# Allegro board quadcopter_0_1.brd
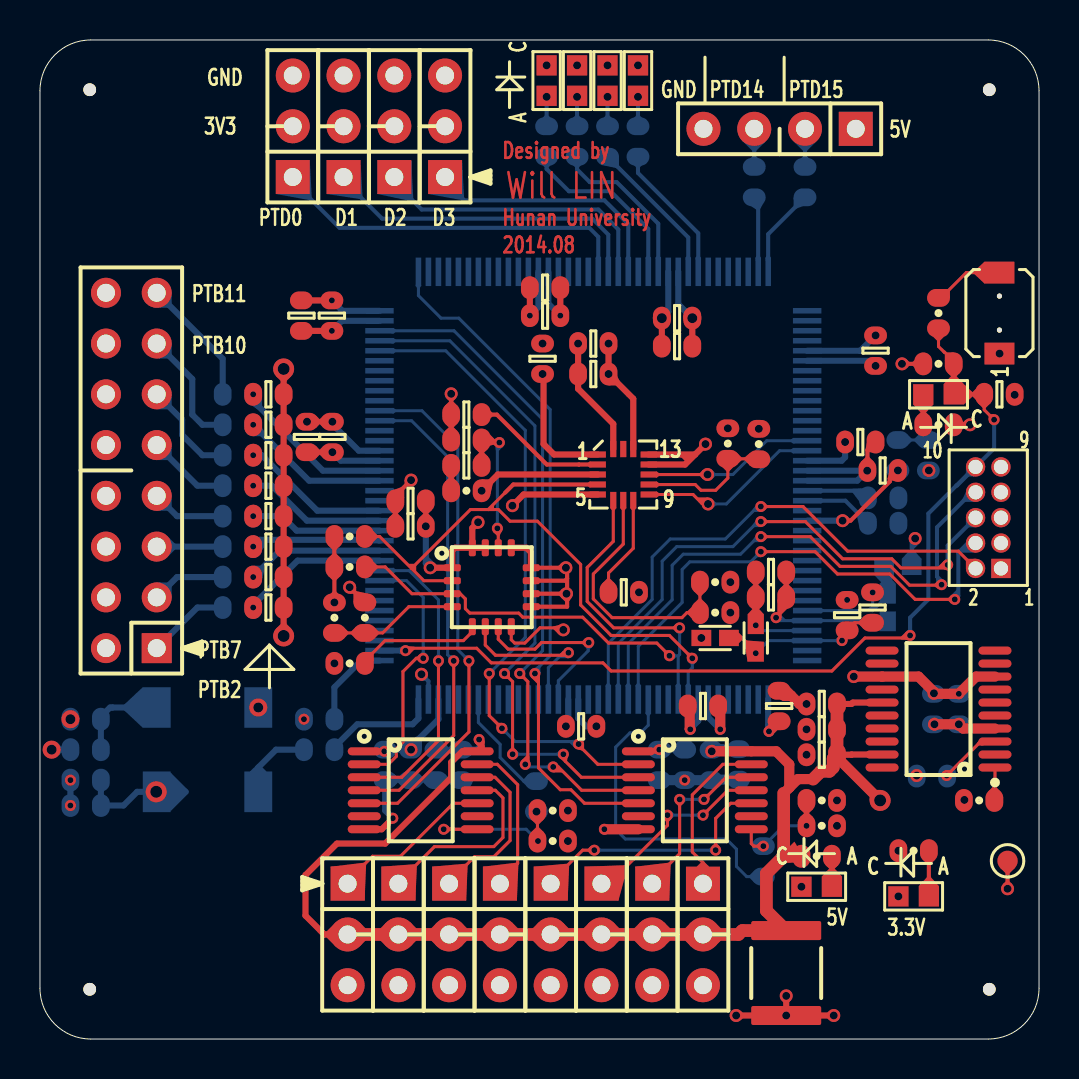
[diagram p0: board, top side]
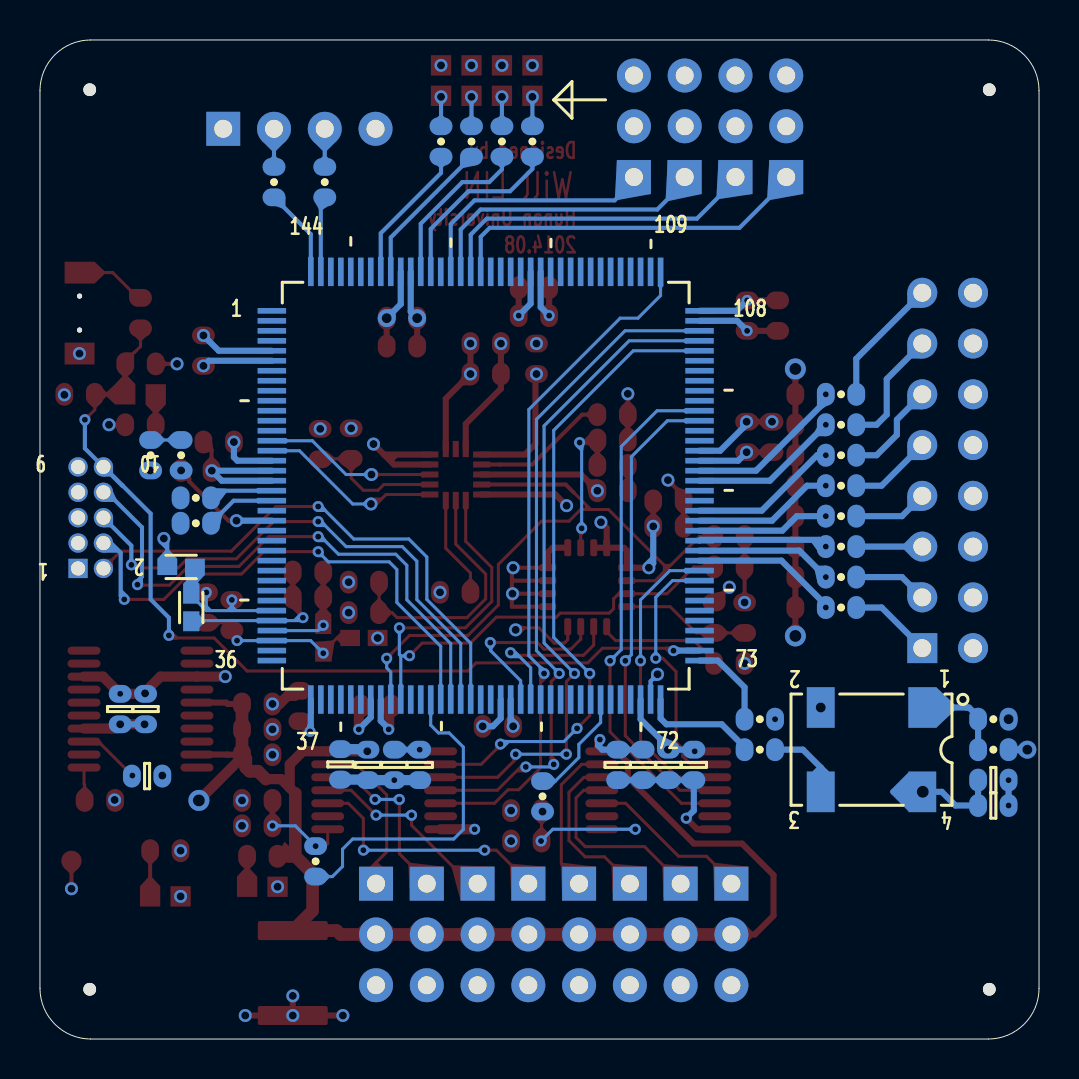
[diagram p1: board, bottom side, seen from below]

Outline 49.99 x 49.99 mm; copper layers: TOP, GND, POWER, BOTTOM. Coordinates in mm from the lower left corner of the outline.
Outline path: 0,47.45 0,2.54 arc(0.74,0.74) 2.54,0 47.45,0 arc(49.24,0.74) 49.99,2.54 49.99,47.45 arc(49.24,49.24) 47.45,49.99 2.54,49.99 arc(0.74,49.24) 0,47.45

## Design rules (mm)
net group ADIN_0: nets ADIN_0 PTB2
net group ADIN_1: nets ADIN_1 PTB3
net group ADIN_2: nets ADIN_2 PTB4
net group ADIN_3: nets ADIN_3 PTB5
net group ADIN_4: nets ADIN_4 PTB6
net group ADIN_5: nets ADIN_5 PTB7
net group ADIN_6: nets ADIN_6 PTB10
net group ADIN_7: nets ADIN_7 PTB11
net group ANALOG_PH: nets DAC0_OUT DAC1_OUT
net group ECHO: nets ECHO PTD14
net group N17070057: nets N17070057 N17070061
net group TRIG: nets PTD15 TRIG
net group TXB0104_OE_1: nets PTE28 TXB0104_OE_1
net group TXB0104_OE_2: nets PTA14 TXB0104_OE_2

## Placement (name value [footprint] x y rotation side)
C1  0.1UF  [CC0603_OV]  31.88 36.07 180 top
C2  0.1UF  [CC0603_OV]  31.88 34.67 180 top
C3  0.1UF  [CC0603_OV]  25.27 36.2 180 top
C4  0.01UF  [CC0603_OV]  36.58 22.1 180 top
C5  0.01UF  [CC0603_OV]  40.39 21.21 270 top
C6  0.1UF  [CC0603_OV]  25.27 37.59 180 top
C7  0.1UF  [CC0603_OV]  13.08 36.2 270 top
C8  0.1UF  [CC0603_OV]  14.61 36.2 270 top
C9  0.1UF  [CC0603_OV]  14.63 30.12 270 top
C10  0.1UF  [CC0603_OV]  13.36 30.12 270 top
C11  10UF  [CC0603_OV]  33.17 16.66 180 top
C12  0.1UF  [CC0603_OV]  36.58 23.37 180 top
C13  0.1UF  [CC0603_OV]  41.66 21.59 270 top
C14  0.1UF  [CC0603_OV]  36.98 16.66 90 top
C15  0.1UF  [CC0603_OV]  42.16 28.45 0 top
C16  0.1uF  [CC0603_OV]  48.01 32.26 180 top
C17  0.1UF  [CC0603_OV]  2.29 12.95 180 bottom
C18  0.01UF  [CC0603_OV]  2.29 11.68 180 bottom
C19  0.1UF  [CC0603_OV]  27.69 33.27 180 top
C20  0.1UF  [CC0603_OV]  27.69 34.8 180 top
C21  4.7uF  [CC0603_OV]  25.15 34.04 90 top
C22  10nF  [CC0603_OV]  21.34 29.97 180 top
C23  470nF  [CC0603_OV]  21.34 28.7 180 top
C24  0.1UF  [CC0603_OV]  18.54 25.65 180 top
C25  4.7uF  [CC0603_OV]  18.54 26.92 180 top
C26  0.1UF  [CC0603_OV]  21.34 31.24 180 top
C27  0.1UF  [CC0603_OV]  29.21 22.35 0 top
C28  0.1UF  [CC0603_OV]  30.99 13.72 270 bottom
C29  4.7uF  [CC0603_OV]  32.26 13.72 270 bottom
C30  4.7uF  [CC0603_OV]  33.58 13.72 270 bottom
C31  0.1UF  [CC0603_OV]  34.95 13.74 270 bottom
C32  1uF  [CC0603_OV]  39.12 14.22 180 top
C33  0.1UF  [CC0603_OV]  39.12 15.49 180 top
C34  47uF  [CC0603_OV]  39.12 16.76 180 top
C35  0.1UF  [CC0603_OV]  45.97 16.51 90 bottom
C36  10UF  [CC0603_OV]  44.7 16.51 90 bottom
C37  ?  [CC0603_OV]  44.63 13.16 180 bottom
C38  0.1UF  [CC0603_OV]  17.27 13.72 270 bottom
C39  4.7uF  [CC0603_OV]  18.54 13.72 270 bottom
C40  4.7uF  [CC0603_OV]  21.08 13.72 270 bottom
C41  0.1UF  [CC0603_OV]  19.81 13.72 270 bottom
C42  47UF  [CAPC4532X185]  37.34 3.3 270 top
C43  0.1UF  [CC0603_OV]  11.43 21.59 0 top
C44  0.1UF  [CC0603_OV]  11.43 23.11 0 top
C45  0.1UF  [CC0603_OV]  11.43 24.64 0 top
C46  0.1UF  [CC0603_OV]  11.43 26.16 0 top
C47  0.1UF  [CC0603_OV]  11.43 27.69 0 top
C48  0.1UF  [CC0603_OV]  11.43 29.21 0 top
C49  0.1UF  [CC0603_OV]  11.43 30.73 0 top
C50  0.1UF  [CC0603_OV]  11.43 32.26 0 top
C51  0.1UF  [CC0603_OV]  41.81 34.44 270 top
C52  0.1UF  [CC0603_OV]  41.05 29.87 0 top
C53  0.1UF  [CC0603_OV]  27.08 15.65 180 top
D1  ORANGE  [LED_0603]  44.96 32.26 0 top
D2  ORANGE  [LED_0603]  25.35 47.96 90 top
D3  ORANGE  [LED_0603]  26.87 47.96 90 top
D4  ORANGE  [LED_0603]  28.4 47.96 90 top
D5  ORANGE  [LED_0603]  29.92 47.96 90 top
D6  ORANGE  [LED_0603]  38.86 7.62 180 top
D7  ORANGE  [LED_0603]  43.71 7.14 180 top
J1  HDR 2X5  [HDR_5X2_FTSH_TH_NSP]  48.08 23.55 180 top
J2  CON4  [HDR254M-1X4]  40.82 45.54 180 top
J4  CON3  [HDR254M-1X3]  33.17 7.77 270 top
J5  CON3  [HDR254M-1X3]  30.63 7.77 270 top
J6  CON3  [HDR254M-1X3]  28.09 7.77 270 top
J7  CON3  [HDR254M-1X3]  25.55 7.77 270 top
J8  CON3  [HDR254M-1X3]  23.01 7.77 270 top
J9  CON3  [HDR254M-1X3]  20.47 7.77 270 top
J10  CON3  [HDR254M-1X3]  17.93 7.77 270 top
J11  CON3  [HDR254M-1X3]  15.39 7.77 270 top
J12  CON16A  [HDR254M-2X8]  5.84 19.56 90 top
J13  CON3  [HDR254M-1X3]  12.65 43.13 90 top
J14  CON3  [HDR254M-1X3]  15.19 43.13 90 top
J15  CON3  [HDR254M-1X3]  17.73 43.13 90 top
J16  CON3  [HDR254M-1X3]  20.27 43.13 90 top
L1  100 OHM@100MHZ  [IND_0603]  42.93 23.62 0 bottom
L2  100 OHM@100MHZ  [IND_0603]  42.42 21.59 90 bottom
L3  100 OHM@100MHZ  [IND_0603]  35.81 20.07 270 top
L4  100 OHM@100MHZ  [IND_0603]  33.78 20.07 180 top
NOREF  -  [unnamed]  47.5 47.5 0 top
NOREF#2  -  [unnamed]  2.49 2.49 0 top
NOREF#3  -  [unnamed]  47.5 2.49 0 top
NOREF#4  -  [unnamed]  2.49 47.5 0 top
R1  0  [RC0603_OV]  13.97 16 180 bottom
R2  10K  [RC0603_OV]  42.93 29.21 90 bottom
R3  10K  [RC0603_OV]  44.45 29.21 270 bottom
R6  3.3K  [RC0603_OV]  44.96 30.73 180 top
R7  10K  [RC0603_OV]  44.96 33.78 180 top
R8  100R  [RC0603_OV]  44.96 36.32 270 top
R9  22  [RC0603_OV]  13.97 14.48 0 bottom
R10  4.7K  [RC0603_OV]  2.29 14.48 180 bottom
R11  4.7K  [RC0603_OV]  2.29 16 180 bottom
R12  10.0K  [RC0603_OV]  21.34 27.43 180 top
R13  4.7K  [RC0603_OV]  15.49 25.15 0 top
R14  4.7K  [RC0603_OV]  15.49 23.62 0 top
R15  10.0K  [RC0603_OV]  15.49 18.8 0 top
R16  10.0K  [RC0603_OV]  14.73 21.08 270 top
R17  10.0K  [RC0603_OV]  33.78 22.86 180 top
R18  10.0K  [RC0603_OV]  16.26 21.08 90 top
R19  10.0K  [RC0603_OV]  33.78 21.34 0 top
R20  10.0K  [RC0603_OV]  34.42 29.79 270 top
R21  10.0K  [RC0603_OV]  35.97 29.77 90 top
R22  3.3K  [RC0603_OV]  25.35 44.91 90 bottom
R23  3.3K  [RC0603_OV]  26.87 44.91 90 bottom
R24  3.3K  [RC0603_OV]  28.4 44.91 90 bottom
R25  3.3K  [RC0603_OV]  29.92 44.91 90 bottom
R26  3.3K  [RC0603_OV]  38.86 9.14 0 top
R27  3.3K  [RC0603_OV]  43.71 9.42 0 top
R28  10.0K  [RC0603_OV]  46.99 11.94 180 top
R29  10.0K  [RC0603_OV]  39.12 11.94 180 top
R30  10.0K  [RC0603_OV]  39.12 10.67 0 top
R31  10.0K  [RC0603_OV]  25.65 9.91 180 top
R32  10.0K  [RC0603_OV]  25.65 11.43 0 top
R33  10.0K  [RC0603_OV]  9.91 21.59 0 bottom
R34  10.0K  [RC0603_OV]  9.91 23.11 0 bottom
R35  10.0K  [RC0603_OV]  9.91 24.64 0 bottom
R36  10.0K  [RC0603_OV]  9.91 26.16 0 bottom
R37  10.0K  [RC0603_OV]  9.91 27.69 0 bottom
R38  10.0K  [RC0603_OV]  9.91 29.21 0 bottom
R39  10.0K  [RC0603_OV]  9.91 30.73 0 bottom
R40  10.0K  [RC0603_OV]  9.91 32.26 0 bottom
R41  10K  [RC0603_OV]  42.19 27.08 0 bottom
R42  10K  [RC0603_OV]  42.19 25.81 0 bottom
R43  0ohm  [RC0603_OV]  36.2 8.89 90 bottom
R44  0ohm  [RC0603_OV]  24.84 12.14 270 bottom
R45  10.0K  [RC0603_OV]  38.28 42.88 90 bottom
R46  10.0K  [RC0603_OV]  35.74 42.88 90 bottom
SW1  SW2_STM151XX  [SW2_4X3MM_SM]  48.01 36.32 90 top
TP1  -  [TPAD_040]  48.41 8.92 0 top
U1  K64_LQ_LQFP_144P  [LQFP144_0P5_20X20MM]  27.69 27.69 180 bottom
U2  FXOS8700CQ  [QFN5X3_0P5_3X3]  29.18 28.24 0 top
U3  L3G4200D  [QFN65P400X400X80-17]  22.61 22.61 0 top
U4  TPS7B6733  [TSSOP65P300X110-20]  44.96 16.51 90 top
U5  txb0104  [TSSOP65P300X110-14]  32.77 12.45 270 top
U6  txb0104  [TSSOP65P300X110-14]  19.05 12.45 270 top
Y1  50MHz  [XTLOSC4_SM]  8.38 14.48 0 bottom

## Library data of the parts
C1-C15 C17 C43-C53 = CAP_NP
C16 = CAP NP
C18 = CAP_NP: tolerance: 20%
C19 C20 C22-C24 C26-C28 C31-C38 C41 = CAP_NP: signal model: DEFAULT_CAPACITOR_100000pF_2_1
C21 C25 C29 C30 C39 C40 = CAP_NP: signal model: DEFAULT_CAPACITOR_4.7e+06pF_2_1
C42 = CAP_NP: User Part Number: pn; Tolerance: RichardLC; signal model: DEFAULT_CAPACITOR_100000pF_2_1
D1-D7 = LED
J1 = CONN_HDR_5X2
J2 = CON4: User Part Number: pn; Tolerance: RichardLC
J4-J11 J13-J16 = CON3: User Part Number: pn; Tolerance: RichardLC
J12 = CON16A: User Part Number: pn; Tolerance: RichardLC
L1-L4 = IND
R1 = RES: tolerance: 1%
R2 R3 R9-R11 R41 R42 = RES
R6 R22-R27 = R
R7 R8 = R2
R12 R15-R21 R28-R40 R43-R46 = RES: signal model: DEFAULT_RESISTOR_10000OHM_2_1
R13 R14 = RES: signal model: DEFAULT_RESISTOR_4700OHM_2_1
SW1 = SW2_STM151XX
TP1 = TestLoop
U1 = K64_LQ_LQFP_1
U2 = FXOS8700CQ_QFN_16P
U3 = L3G4200D: User Part Number: pn; Tolerance: RichardLC
U4 = TPS7B6733: User Part Number: pn; Tolerance: RichardLC
U5 U6 = txb0104: User Part Number: pn; Tolerance: RichardLC
Y1 = OSC4_KC2520

## Footprints (pads in the part's own frame, mm; a bottom-side part is the same pattern mirrored in y, then rotated)
CAPC4532X185
  custom 0.95x3.5 smd: 1(-2.125,0) 2(2.125,0)
CC0603_OV
  oval 0.889x1.143 smd: 1(-0.762,0) 2(0.762,0)
HDR254M-1X3
  rect 1.7x1.7 hole 0.9: 1(0,0)
  round 1.7 hole 0.9: 2(2.54,0) 3(5.08,0)
HDR254M-1X4
  rect 1.7x1.7 hole 0.9: 1(0,0)
  round 1.7 hole 0.9: 2(2.54,0) 3(5.08,0) 4(7.62,0)
HDR254M-2X8
  rect 1.5x1.5 hole 0.9: 1(0,0)
  round 1.5 hole 0.9: 2(0,2.54) 3(2.54,0) 4(2.54,2.54) 5(5.08,0) 6(5.08,2.54) 7(7.62,0) 8(7.62,2.54) 9(10.16,0) 10(10.16,2.54) 11(12.7,0) 12(12.7,2.54) 13(15.24,0) 14(15.24,2.54) 15(17.78,0) 16(17.78,2.54)
HDR_5X2_FTSH_TH_NSP
  rect 0.965x0.965 hole 0.711: 1(0,0)
  round 0.965 hole 0.711: 2(1.27,0) 3(0,-1.27) 4(1.27,-1.27) 5(0,-2.54) 6(1.27,-2.54) 7(0,-3.81) 8(1.27,-3.81) 9(0,-5.08) 10(1.27,-5.08)
IND_0603
  rect 0.991x0.813 smd: 1(-0.69,0) 2(0.69,0)
LED_0603
  rect 1.016x1.016 smd: A(-0.762,0) C(0.762,0)
LQFP144_0P5_20X20MM
  rect 1.422x0.279 smd: 1(-10.7,8.75) 2(-10.7,8.25) 3(-10.7,7.75) 4(-10.7,7.25) 5(-10.7,6.75) 6(-10.7,6.25) 7(-10.7,5.75) 8(-10.7,5.25) 9(-10.7,4.75) 10(-10.7,4.25) 11(-10.7,3.75) 12(-10.7,3.25) 13(-10.7,2.75) 14(-10.7,2.25) 15(-10.7,1.75) 16(-10.7,1.25) 17(-10.7,0.75) 18(-10.7,0.25) 19(-10.7,-0.25) 20(-10.7,-0.75) 21(-10.7,-1.25) 22(-10.7,-1.75) 23(-10.7,-2.25) 24(-10.7,-2.75) 25(-10.7,-3.25) 26(-10.7,-3.75) 27(-10.7,-4.25) 28(-10.7,-4.75) 29(-10.7,-5.25) 30(-10.7,-5.75) 31(-10.7,-6.25) 32(-10.7,-6.75) 33(-10.7,-7.25) 34(-10.7,-7.75) 35(-10.7,-8.25) 36(-10.7,-8.75) 73(10.7,-8.75) 74(10.7,-8.25) 75(10.7,-7.75) 76(10.7,-7.25) 77(10.7,-6.75) 78(10.7,-6.25) 79(10.7,-5.75) 80(10.7,-5.25) 81(10.7,-4.75) 82(10.7,-4.25) 83(10.7,-3.75) 84(10.7,-3.25) 85(10.7,-2.75) 86(10.7,-2.25) 87(10.7,-1.75) 88(10.7,-1.25) 89(10.7,-0.75) 90(10.7,-0.25) 91(10.7,0.25) 92(10.7,0.75) 93(10.7,1.25) 94(10.7,1.75) 95(10.7,2.25) 96(10.7,2.75) 97(10.7,3.25) 98(10.7,3.75) 99(10.7,4.25) 100(10.7,4.75) 101(10.7,5.25) 102(10.7,5.75) 103(10.7,6.25) 104(10.7,6.75) 105(10.7,7.25) 106(10.7,7.75) 107(10.7,8.25) 108(10.7,8.75)
  rect 0.279x1.422 smd: 37(-8.75,-10.7) 38(-8.25,-10.7) 39(-7.75,-10.7) 40(-7.25,-10.7) 41(-6.75,-10.7) 42(-6.25,-10.7) 43(-5.75,-10.7) 44(-5.25,-10.7) 45(-4.75,-10.7) 46(-4.25,-10.7) 47(-3.75,-10.7) 48(-3.25,-10.7) 49(-2.75,-10.7) 50(-2.25,-10.7) 51(-1.75,-10.7) 52(-1.25,-10.7) 53(-0.75,-10.7) 54(-0.25,-10.7) 55(0.25,-10.7) 56(0.75,-10.7) 57(1.25,-10.7) 58(1.75,-10.7) 59(2.25,-10.7) 60(2.75,-10.7) 61(3.25,-10.7) 62(3.75,-10.7) 63(4.25,-10.7) 64(4.75,-10.7) 65(5.25,-10.7) 66(5.75,-10.7) 67(6.25,-10.7) 68(6.75,-10.7) 69(7.25,-10.7) 70(7.75,-10.7) 71(8.25,-10.7) 72(8.75,-10.7) 109(8.75,10.7) 110(8.25,10.7) 111(7.75,10.7) 112(7.25,10.7) 113(6.75,10.7) 114(6.25,10.7) 115(5.75,10.7) 116(5.25,10.7) 117(4.75,10.7) 118(4.25,10.7) 119(3.75,10.7) 120(3.25,10.7) 121(2.75,10.7) 122(2.25,10.7) 123(1.75,10.7) 124(1.25,10.7) 125(0.75,10.7) 126(0.25,10.7) 127(-0.25,10.7) 128(-0.75,10.7) 129(-1.25,10.7) 130(-1.75,10.7) 131(-2.25,10.7) 132(-2.75,10.7) 133(-3.25,10.7) 134(-3.75,10.7) 135(-4.25,10.7) 136(-4.75,10.7) 137(-5.25,10.7) 138(-5.75,10.7) 139(-6.25,10.7) 140(-6.75,10.7) 141(-7.25,10.7) 142(-7.75,10.7) 143(-8.25,10.7) 144(-8.75,10.7)
QFN5X3_0P5_3X3
  rect 0.813x0.305 smd: 1(-1.275,1) 2(-1.275,0.5) 3(-1.275,0) 4(-1.275,-0.5) 5(-1.275,-1) 9(1.275,-1) 10(1.275,-0.5) 11(1.275,0) 12(1.275,0.5) 13(1.275,1)
  rect 0.305x0.813 smd: 6(-0.5,-1.275) 7(0,-1.275) 8(0.5,-1.275) 14(0.5,1.275) 15(0,1.275) 16(-0.5,1.275)
QFN65P400X400X80-17
  custom 0.85x0.35 smd: 1(-1.975,0.975) 2(-1.975,0.325) 3(-1.975,-0.325) 4(-1.975,-0.975) 9(1.975,-0.975) 10(1.975,-0.325) 11(1.975,0.325) 12(1.975,0.975)
  custom 0.35x0.85 smd: 5(-0.975,-1.975) 6(-0.325,-1.975) 7(0.325,-1.975) 8(0.975,-1.975) 13(0.975,1.975) 14(0.325,1.975) 15(-0.325,1.975) 16(-0.975,1.975)
RC0603_OV
  oval 0.889x1.143 smd: 1(-0.762,0) 2(0.762,0)
SW2_4X3MM_SM
  round 0.254 hole 0.711 unplated: (-0.85,0) (0.85,0)
  rect 1.092x1.499 smd: 1(-2.025,0) 2(2.025,0)
TPAD_040
  round 1.016 smd: 1(0,0)
TSSOP65P300X110-14
  oval 0.4x1.65 smd: 1(-1.95,-2.825) 2(-1.3,-2.825) 3(-0.65,-2.825) 4(0,-2.825) 5(0.65,-2.825) 6(1.3,-2.825) 7(1.95,-2.825) 8(1.95,2.825) 9(1.3,2.825) 10(0.65,2.825) 11(0,2.825) 12(-0.65,2.825) 13(-1.3,2.825) 14(-1.95,2.825)
TSSOP65P300X110-20
  oval 0.4x1.65 smd: 1(-2.925,-2.825) 2(-2.275,-2.825) 3(-1.625,-2.825) 4(-0.975,-2.825) 5(-0.325,-2.825) 6(0.325,-2.825) 7(0.975,-2.825) 8(1.625,-2.825) 9(2.275,-2.825) 10(2.925,-2.825) 11(2.925,2.825) 12(2.275,2.825) 13(1.625,2.825) 14(0.975,2.825) 15(0.325,2.825) 16(-0.325,2.825) 17(-0.975,2.825) 18(-1.625,2.825) 19(-2.275,2.825) 20(-2.925,2.825)
unnamed
  round 0.635 hole 3.175 unplated: (0,0)
XTLOSC4_SM
  rect 1.397x2.032 smd: 1(-2.54,-2.11) 2(2.54,-2.11) 3(2.54,2.11) 4(-2.54,2.11)

## Nets
GND: C1.2 C2.2 C3.2 C6.2 C7.2 C8.2 C9.2 C10.2 C11.2 C14.2 C15.1 C16.1 C17.2 C18.2 C19.2 C20.2 C21.2 C22.2 C24.2 C25.2 C26.2 C27.2 C28.2 C29.2 C30.2 C31.2 C32.2 C33.2 C34.2 C35.2 C36.2 C37.2 C38.2 C39.2 C40.2 C41.2 C42.2 C43.2 C44.2 C45.2 C46.2 C47.2 C48.2 C49.2 C50.2 C51.2 C52.2 C53.2 D2.C(CATHODE) D3.C(CATHODE) D4.C(CATHODE) D5.C(CATHODE) D6.C(CATHODE) D7.C(CATHODE) J1.3(A2) J1.5(A3) J2.4 J4.3 J5.3 J6.3 J7.3 J8.3 J9.3 J10.3 J11.3 J12.2 J12.4 J12.6 J12.8 J12.10 J12.12 J12.14 J12.16 J13.3 J14.3 J15.3 J16.3 L4.2 R1.2 R3.2 R11.2 R12.1 R18.2 R19.2 R21.2 R30.2 R32.2 SW1.1(SW1) U1.6(VSS1) U1.17(VSS2) U1.18(VSSUSB) U1.44(VSS3) U1.57(VSS4) U1.71(VSS5) U1.93(VSS6) U1.107(VSS7) U1.121(VSS8) U1.134(VSS9) U2.3(RSVD1) U2.5(GND1) U2.12(GND2) U2.13(RSVD2) U2.16(RST) U3.8(RES#8) U3.9(RES#9) U3.10(RES#10) U3.11(RES#11) U3.12(RES#12) U3.13(GND) U4.8(GND#8) U4.13(GND#13) U5.7(GND) U6.7(GND) Y1.2(GND)
P3V3: C1.1 C2.1 C3.1 C6.1 C7.1 C8.1 C9.1 C10.1 C11.1 C17.1 C18.1 C19.1 C20.1 C21.1 C24.1 C25.1 C28.1 C29.1 C35.1 C36.1 C38.1 C39.1 C51.1 C52.1 C53.1 J1.1(A1) J13.2 J14.2 J15.2 J16.2 L1.2 R6.1 R7.2 R10.2 R13.1 R14.1 R15.1 R16.1 R17.1 R20.1 R27.1 R28.2 R29.1 R31.1 TP1.1(PIN1) U1.5(VDD1) U1.16(VDD2) U1.43(VDD3) U1.56(VDD4) U1.70(VDD5) U1.94(VDD6) U1.108(VDD7) U1.122(VDD8) U1.135(VDD9) U2.1(VDDIO) U2.14(VDD) U3.1(VDDIO) U3.15(RES#15) U3.16(VDD) U4.4(VOUT) U5.1(VCCA) U6.1(VCCA) Y1.4(VCC)
P5V: C30.1 C31.1 C32.1 C33.1 C34.1 C40.1 C41.1 C42.1 J2.1 J4.2 J5.2 J6.2 J7.2 J8.2 J9.2 J10.2 J11.2 R26.1 U4.15(EN) U4.19(VIN) U5.14(VCCB) U6.14(VCCB)
VBAT: U1.42(VBAT)
VDDA: C5.1 C13.1 L1.1 L2.2 U1.31(VDDA)
VSSA: C5.2 C13.2 L3.2 L4.1 U1.34(VSSA)
50MHZ_OSC: R9.2 U1.72(PTA18/EXTAL0/FTM0_FLT2/FTM_CLKI)
ADC0_DM0/ADC1_DM3: U1.28(ADC0_DM0/ADC1_DM3)
ADC0_DM1: U1.24(ADC0_DM1)
ADC0_DP0/AD1_DP3: U1.27(ADC0_DP0/ADC1_DP3)
ADC0_DP1: U1.23(ADC0_DP1)
ADC0_SE16: R2.2 R3.1
ADC0_SE16/ADC0_SE21: U1.36(ADC0_SE16/ADC0_SE21/CMP1_IN2)
ADC1_DM0/ADC0_DM3: U1.30(ADC1_DM0/ADC0_DM3)
ADC1_DM1: U1.26(ADC1_DM1)
ADC1_DP0/ADC0_DP3: U1.29(ADC1_DP0/ADC0_DP3)
ADC1_DP1: U1.25(ADC1_DP1)
ADC1_SE16/ADC0_SE22: U1.35(ADC1_SE16/ADC0_SE22/CMP2_IN2)
ADIN_0: J12.1 R33.1
ADIN_1: J12.3 R34.1
ADIN_2: J12.5 R35.1
ADIN_3: J12.7 R36.1
ADIN_4: J12.9 R37.1
ADIN_5: J12.11 R38.1
ADIN_6: J12.13 R39.1
ADIN_7: J12.15 R40.1
DAC0_OUT: U1.38(DAC0_OUT/CMP1_IN3/ADC0_SE23)
DAC1_OUT: U1.39(DAC1_OUT/CMP0_IN4/CMP2_IN3/ADC1)
ECHO: J2.3 R46.2
FXOS8700CQ_CRST: C27.1 U2.8(CRST)
FXOS8700CQ_I2C_SA0: R17.2 R19.1 U2.7(SA0/MISO)
FXOS8700CQ_I2C_SA1: R20.2 R21.1 U2.10(SA1/C\S\)
L3G4200D_I2C_SA0: R16.2 R18.1 U3.4(SDO/SA0)
MMA8451_BYP: C26.1 U2.2(BYP)
OSC_OE: R10.1 R11.1 Y1.1(I\N\H\)
PTA0: J1.4(B2) U1.50(PTA0/JTAG_TCLK/SWD_CLK/EZP_CLK/)
PTA1: J1.8(B4) U1.51(PTA1/JTAG_TDI/EZP_DI/UART0_RX/F)
PTA2: J1.6(B3) U1.52(PTA2/JTAG_TDO/TRACE_SWO/EZP_DO/)
PTA3: J1.2(B1) U1.53(PTA3/JTAG_TMS/SWD_DIO/U\A\R\T\0)
PTA4: U1.54(PTA4/LLWU_P3/N\M\I\/E\Z\P\_\C\S)
PTA5: U1.55(PTA5/USB0_CLKIN/FTM0_CH2/RMII0_)
PTA6: U1.58(PTA6/FTM0_CH3/CLKOUTB/TRACE_CLK) U3.7(INT)
PTA7: U1.59(PTA7/ADC0_SE10/FTM0_CH4/TRACE_D) U3.6(DRDY/INT2)
PTA8: U1.60(PTA8/ADC0_SE11/FTM1_CH0/FTM1_QD)
PTA9: U1.61(PTA9/FTM1_CH1/MII0_RXD3/FTM1_QD)
PTA10: U1.62(PTA10/FTM2_CH0/MII0_RXD2/FTM2_Q)
PTA11: U1.63(PTA11/FTM2_CH1/MII0_RXCLK/I2C2_)
PTA12: U1.64(PTA12/CMP2_IN0/CAN0_TX/FTM1_CH0)
PTA13: U1.65(PTA13/LLWU_P4/CMP2_IN1/CAN0_RX/)
PTA14: R44.1 U1.66(PTA14/SPI0_PCS0/UART0_TX/RMII0_)
PTA15: U1.67(PTA15/SPI0_SCK/UART0_RX/RMII0_T)
PTA16: U1.68(PTA16/SPI0_SOUT/U\A\R\T\0\_\C\T)
PTA17: U1.69(PTA17/ADC1_SE17/SPI0_SIN/U\A\R\)
PTA24: U1.75(PTA24/MII0_TXD2/FB_A29)
PTA25: U1.76(PTA25/MII0_TXCLK/FB_A28)
PTA26: U1.77(PTA26/MII0_TXD3/FB_A27)
PTA27: U1.78(PTA27/MII0_CRS/FB_A26)
PTA28: U1.79(PTA28/MII0_TXER/FB_A25)
PTA29: U1.80(PTA29/MII0_COL/FB_A24)
PTB0: U1.81(PTB0/LLWU_P5/ADC0_SE8/ADC1_SE8/) U6.2(A1)
PTB1: U1.82(PTB1/ADC0_SE9/ADC1_SE9/I2C0_SDA) U6.3(A2)
PTB2: C43.1 R33.2 U1.83(PTB2/ADC0_SE12/I2C0_SCL/U\A\R\T)
PTB3: C44.1 R34.2 U1.84(PTB3/ADC0_SE13/I2C0_SDA/U\A\R\T)
PTB4: C45.1 R35.2 U1.85(PTB4/ADC1_SE10/ENET0_1588_TMR2/)
PTB5: C46.1 R36.2 U1.86(PTB5/ADC1_SE11/ENET0_1588_TMR3/)
PTB6: C47.1 R37.2 U1.87(PTB6/ADC1_SE12/FB_AD23)
PTB7: C48.1 R38.2 U1.88(PTB7/ADC1_SE13/FB_AD22)
PTB8: U1.89(PTB8/U\A\R\T\3\_\R\T\S\/FB_AD21)
PTB9: U1.90(PTB9/SPI1_PCS1/U\A\R\T\3\_\C\T\)
PTB10: C49.1 R39.2 U1.91(PTB10/ADC1_SE14/SPI1_PCS0/UART3)
PTB11: C50.1 R40.2 U1.92(PTB11/ADC1_SE15/SPI1_SCK/UART3_)
PTB16: U1.95(PTB16/SPI1_SOUT/UART0_RX/FTM_CL)
PTB17: U1.96(PTB17/SPI1_SIN/UART0_TX/FTM_CLK)
PTB18: U1.97(PTB18/CAN0_TX/FTM2_CH0/I2S0_TX_) U6.4(A3)
PTB19: U1.98(PTB19/CAN0_RX/FTM2_CH1/I2S0_TX_) U6.5(A4)
PTB20: U1.99(PTB20/SPI2_PCS0/FB_AD31/CMP0_OU)
PTB21: U1.100(PTB21/SPI2_SCK/FB_AD30/CMP1_OUT)
PTB22: U1.101(PTB22/SPI2_SOUT/FB_AD29/CMP2_OU)
PTB23: U1.102(PTB23/SPI2_SIN/SPI0_PCS5/FB_AD2)
PTC0: U1.103(PTC0/ADC0_SE14/SPI0_PCS4/PDB0_E)
PTC1: U1.104(PTC1/LLWU_P6/ADC0_SE15/SPI0_PCS) U5.2(A1)
PTC2: U1.105(PTC2/ADC0_SE4B/CMP1_IN0/SPI0_PC) U5.3(A2)
PTC3: U1.106(PTC3/LLWU_P7/CMP1_IN1/SPI0_PCS1) U5.4(A3)
PTC4: U1.109(PTC4/LLWU_P8/SPI0_PCS0/UART1_TX) U5.5(A4)
PTC5: U1.110(PTC5/LLWU_P9/SPI0_SCK/LPTMR0_AL)
PTC6: U1.111(PTC6/LLWU_P10/CMP0_IN0/SPI0_SOU)
PTC7: U1.112(PTC7/CMP0_IN1/SPI0_SIN/USB0_SOF)
PTC8: U1.113(PTC8/ADC1_SE4B/CMP0_IN2/FTM3_CH)
PTC9: U1.114(PTC9/ADC1_SE5B/CMP0_IN3/FTM3_CH)
PTC10: U1.115(PTC10/ADC1_SE6B/I2C1_SCL/FTM3_C)
PTC11: U1.116(PTC11/LLWU_P11/ADC1_SE7B/I2C1_S)
PTC12: U1.117(PTC12/U\A\R\T\4\_\R\T\S\/FB_AD2)
PTC13: U1.118(PTC13/U\A\R\T\4\_\C\T\S\/FB_AD2)
PTC14: U1.119(PTC14/UART4_RX/FB_AD25)
PTC15: U1.120(PTC15/UART4_TX/FB_AD24)
PTC16: U1.123(PTC16/UART3_RX/ENET0_1588_TMR0/)
PTC17: U1.124(PTC17/UART3_TX/ENET0_1588_TMR1/)
PTC18: U1.125(PTC18/U\A\R\T\3\_\R\T\S\/ENET0_)
PTC19: U1.126(PTC19/U\A\R\T\3\_\C\T\S\/ENET0_)
PTD0: J13.1 U1.127(PTD0/LLWU_P12/SPI0_PCS0/U\A\R\T)
PTD1: J14.1 U1.128(PTD1/ADC0_SE5B/SPI0_SCK/U\A\R\T)
PTD2: J15.1 U1.129(PTD2/LLWU_P13/SPI0_SOUT/UART2_R)
PTD3: J16.1 U1.130(PTD3/SPI0_SIN/UART2_TX/FTM3_CH3)
PTD4: U1.131(PTD4/LLWU_P14/SPI0_PCS1/U\A\R\T)
PTD5: R22.1 U1.132(PTD5/ADC0_SE6B/SPI0_PCS2/U\A\R\)
PTD6: R23.1 U1.133(PTD6/LLWU_P15/ADC0_SE7B/SPI0_PC)
PTD7: R24.1 U1.136(PTD7/CMT_IRO/UART0_TX/FTM0_CH7/)
PTD8: R25.1 U1.137(PTD8/I2C0_SCL/UART5_RX/FB_A16)
PTD9: U1.138(PTD9/I2C0_SDA/UART5_TX/FB_A17)
PTD10: U1.139(PTD10/U\A\R\T\5\_\R\T\S\/FB_A18)
PTD11: U1.140(PTD11/SPI2_PCS0/U\A\R\T\5\_\C\T)
PTD12: U1.141(PTD12/SPI2_SCK/FTM3_FLT0/SDHC0_)
PTD13: U1.142(PTD13/SPI2_SOUT/SDHC0_D5/FB_A21)
PTD14: R46.1 U1.143(PTD14/SPI2_SIN/SDHC0_D6/FB_A22)
PTD15: R45.1 U1.144(PTD15/SPI2_PCS1/SDHC0_D7/FB_A23)
PTE0: U1.1(PTE0/CLKOUT32K/ADC1_SE4A/SPI1_P)
PTE1: U1.2(PTE1/LLWU_P0/ADC1_SE5A/SPI1_SOU)
PTE2: U1.3(PTE2/LLWU_P1/ADC0_DP2/ADC1_SE6A)
PTE3: U1.4(PTE3/ADC0_DM2/ADC1_SE7A/SPI1_SI)
PTE4: U1.7(PTE4/LLWU_P2/SPI1_PCS0/UART3_TX)
PTE5: U1.8(PTE5/SPI1_PCS2/UART3_RX/SDHC0_D)
PTE6: U1.9(PTE6/SPI1_PCS3/U\A\R\T\3\_\C\T\)
PTE7: U1.10(PTE7/U\A\R\T\3\_\R\T\S\/I2S0_RX)
PTE8: U1.11(PTE8/I2S0_RXD1/UART5_TX/I2S0_RX)
PTE9: U1.12(PTE9/I2S0_TXD1/UART5_RX/I2S0_RX)
PTE10: U1.13(PTE10/U\A\R\T\5\_\C\T\S\/I2S0_T)
PTE11: U1.14(PTE11/U\A\R\T\5\_\R\T\S\/I2S0_T) U2.11(INT1)
PTE12: U1.15(PTE12/I2S0_TX_BCLK/FTM3_CH7) U2.9(INT2)
PTE24: R13.2 U1.45(PTE24/ADC0_SE17/UART4_TX/I2C0_S) U2.4(SCL/SCLK) U3.2(SCL/SPC)
PTE25: R14.2 U1.46(PTE25/ADC0_SE18/UART4_RX/I2C0_S) U2.6(SDA/MOSI) U3.3(SDA/SDI/SDO)
PTE26: U1.47(PTE26/CLKOUT32K/ENET_1588_CLKIN)
PTE27: U1.48(PTE27/U\A\R\T\4\_\R\T\S\)
PTE28: R43.1 U1.49(PTE28)
PWM_MOTOR1: J4.1 U5.13(B1)
PWM_MOTOR2: J5.1 U5.12(B2)
PWM_MOTOR3: J6.1 U5.11(B3)
PWM_MOTOR4: J7.1 U5.10(B4)
PWM_MOTOR5: J8.1 U6.13(B1)
PWM_MOTOR6: J9.1 U6.12(B2)
PWM_MOTOR7: J10.1 U6.11(B3)
PWM_MOTOR8: J11.1 U6.10(B4)
RESET_B: C16.2 D1.C(CATHODE) J1.10(B5) R7.1 R8.2 U1.74(R\E\S\E\T\)
TRIG: J2.2 R45.2
TXB0104_OE_1: R29.2 R30.1 R43.2 U5.8(OE)
TXB0104_OE_2: R31.2 R32.1 R44.2 U6.8(OE)
VOUT_3V3: U1.21(VOUT33)
VREF_OUT: C14.1 U1.37(VREF_OUT/CMP1_IN5/CMP0_IN5/ADC1)
VREFH: C4.1 C12.1 L2.1 U1.32(VREFH)
VREFL: C4.2 C12.2 L3.1 U1.33(VREFL)
VREGIN: C15.2 R2.1 U1.22(VREGIN)
XTAL_K64_MAIN: R1.1 U1.73(PTA19/XTAL0/FTM1_FLT0/FTM_CLKIN)
N17061674: R9.1 Y1.3(OUT)
N17069954: R15.2 U3.5(CS)
N17070057: C22.1 C23.1 U3.14(PLLFILT)
N17070061: C23.2 R12.2
N17085879: R8.1 SW1.2(SW2)
N17103835: C37.1 U4.3(DELAY)
N17105972: R28.1 U4.1(RESET)
N17115759: D1.A(ANODE) R6.2
N17115953: D6.A(ANODE) R26.2
N17116464: D7.A(ANODE) R27.2
N17116870: D2.A(ANODE) R22.2
N17116951: D3.A(ANODE) R23.2
N17117026: D4.A(ANODE) R24.2
N17117112: D5.A(ANODE) R25.2
N17132154: R41.1 U1.19(USB0_DP)
N17132157: R42.1 U1.20(USB0_DM)

Pads without a net: J1 7 9; R41 2; R42 2; U1 40 41; U2 15; U4 2 5 6 7 9 10 11 12 14 16 17 18 20; U5 6 9; U6 6 9

## Via types
v1: diameter 0.65, hole 0.4, TOP to BOTTOM, 77 vias
v2: diameter 0.55, hole 0.3, TOP to BOTTOM, 74 vias
v3: diameter 1.05, hole 0.6, TOP to BOTTOM, 4 vias
v4: diameter 0.9, hole 0.5, TOP to BOTTOM, 5 vias

## Routing (per net, layer and track width the routed paths; a pad name or vN(x,y) marks a point on that pad's centre or on a via; arc(x,y) is an arc through that point)
GND: length 311.2
  TOP w0.152: U3.8 23.58,19.98 23.75,19.81 24.26,19.81 25.02,20.57 26.06,20.57 ; 12.19,24.31 C45.2 12.19,24.77 ; v1(26.31,23.58) 26.38,23.58 26.42,23.62 ; 26.38,22.31 26.42,22.35
  TOP w0.203: C10.2 v1(14.63,29.36) ; v1(20.57,32.28) C26.2 C22.2 ; U3.9 26.38,21.63 26.38,22.25 v1(26.35,22.28) ; v1(26.35,22.28) 26.38,22.31 26.38,23.04 ; v1(26.35,22.28) U3.10 ; v1(18.57,27.97) 17.78,27.18 C25.2 C24.2 ; 26.06,20.57 26.09,20.57 v1(26.19,20.47) ; 26.38,23.04 26.38,23.58 ; 26.38,23.04 26.27,22.93 U3.11 ; SW1.1 v1(48.01,34.3) ; U3.12 v1(26.31,23.58) ; 41.81,18.19 42.08,18.19 U4.13 ; C15.1 41.4,29.46 C52.2 ; C16.1 v1(48.77,32.23) ; v1(15.49,22.61) R18.2
  TOP w0.305: v3(12.19,20.17) C43.2 C44.2 12.19,24.31 ; v1(37.34,1.18) v1(37.34,2.16) ; v1(37.34,1.18) v1(39.72,1.18) ; v1(37.34,1.18) v1(34.83,1.18) ; v2(17.65,11.05) 17.1,10.5 U6.7 ; v1(23.64,26.69) 24.2,27.24 U2.5 ; U2.3 22.91,28.24 v1(22.1,27.43) ; C7.2 v2(14.61,35.43) ; v3(12.19,33.53) C50.2 C49.2 C48.2 C47.2 C46.2 12.19,24.77 ; C6.2 v2(24.51,36.2) ; 32.78,29.24 32.28,28.74 U2.12 ; 32.78,29.24 U2.13 ; 32.78,29.24 v1(33.3,29.77) ; U2.16 28.68,30.78 26.92,32.54 C19.2 v1(26.92,34.8) ; U3.13 24.34,24.58 24.56,24.36 24.56,23.6 U3.12 ; C2.2 v4(31.12,36.07)
  TOP w0.508: C14.2 37.24,17.17 37.6,17.17 38,16.76 v1(38.35,16.76) ; v1(40.72,18.13) U4.13 43.96,18.13 44.73,17.36 v1(44.73,17.3) 44.75,17.27 v2(45.97,17.27) 46.84,18.13 U4.8 ; C11.2 32.51,16.56 32.51,15.52 v2(32.54,15.49) ; U5.7 v2(28.24,10.5)
  GND w0.203: 49,26.06 48.97,26.09 J1.5 J1.3 49.1,24.82
  GND w0.508: v1(38.35,14.22) 38.86,14.22 ; v1(38.35,14.22) 38.35,13.72 ; v1(38.35,14.22) 37.85,14.22 ; v1(38.35,14.22) 38.35,14.73 ; v1(23.64,26.69) 24.14,26.69 ; v1(23.64,26.69) 23.14,26.69 ; v1(23.64,26.69) 23.64,27.19 ; v1(23.64,26.69) 23.64,26.18 ; v1(40.72,18.13) 40.72,18.64 ; v1(40.72,18.13) 41.22,18.13 ; v1(40.72,18.13) 40.72,17.63 ; v1(40.72,18.13) 40.21,18.13 ; 13.21,15.55 v2(13.21,16) ; v2(13.21,16) 12.76,16 ; v2(13.21,16) 13.21,16.45 ; v2(13.21,16) 13.66,16 ; 32.8,29.77 v1(33.3,29.77) ; v1(33.3,29.77) 33.3,30.27 ; v1(33.3,29.77) 33.8,29.77 ; v1(33.3,29.77) 33.3,29.27 ; 43.87,12.68 v1(43.87,13.18) ; v1(43.87,13.18) 43.36,13.18 ; v1(43.87,13.18) 44.37,13.18 ; v1(43.87,13.18) 43.87,13.69 ; 25.81,23.58 v1(26.31,23.58) ; v1(26.31,23.58) 26.82,23.58 ; v1(26.31,23.58) 26.31,23.08 ; v1(26.31,23.58) 26.31,24.08 ; 38.1,7.12 v1(38.1,7.62) ; v1(38.1,7.62) 38.1,8.12 ; v1(38.1,7.62) 37.6,7.62 ; v1(38.1,7.62) 38.6,7.62 ; 1.52,12.5 v2(1.52,12.95) ; v2(1.52,12.95) 1.52,13.41 ; v2(1.52,12.95) 1.07,12.95 ; v2(1.52,12.95) 1.98,12.95 ; v1(26.31,15.65) 26.31,16.15 ; v1(26.31,15.65) 26.82,15.65 ; v1(26.31,15.65) 25.81,15.65 ; 25.35,48.21 v1(25.35,48.72) ; v1(25.35,48.72) 25.85,48.72 ; v1(25.35,48.72) 25.35,49.22 ; v1(25.35,48.72) 24.85,48.72 ; v1(29.97,22.35) 30.47,22.35 ; v1(29.97,22.35) 29.97,21.85 ; v1(29.97,22.35) 29.97,22.85 ; v1(29.97,22.35) 29.47,22.35 ; 28.4,48.21 v1(28.4,48.72) ; v1(28.4,48.72) 28.4,49.22 ; v1(28.4,48.72) 28.9,48.72 ; v1(28.4,48.72) 27.89,48.72 ; 3.3,28.79 J12.10 ; J12.10 4.23,29.72 ; J12.10 3.3,30.65 ; J12.10 2.37,29.72 ; 30.63,1.66 J5.3 ; J5.3 31.66,2.69 ; J5.3 29.6,2.69 ; J5.3 30.63,3.72 ; v1(39.72,1.18) 39.72,1.68 ; v1(39.72,1.18) 40.22,1.18 ; v1(39.72,1.18) 39.21,1.18 ; v1(39.72,1.18) 39.72,0.67 ; v1(37.34,2.16) 37.84,2.16 ; v1(37.34,2.16) 37.34,2.66 ; v1(37.34,2.16) 36.84,2.16 ; J9.3 20.47,3.72 ; J9.3 20.47,1.66 ; J9.3 19.44,2.69 ; J9.3 21.5,2.69 ; 44.48,27.95 v1(44.48,28.45) ; v1(44.48,28.45) 44.98,28.45 ; v1(44.48,28.45) 44.48,28.95 ; v1(44.48,28.45) 43.97,28.45 ; J4.3 34.2,2.69 ; J4.3 32.14,2.69 ; J4.3 33.17,3.72 ; J4.3 33.17,1.66 ; 1.52,11.23 v2(1.52,11.68) ; v2(1.52,11.68) 1.07,11.68 ; v2(1.52,11.68) 1.52,12.14 ; v2(1.52,11.68) 1.98,11.68 ; 38.35,16.26 v1(38.35,16.76) ; v1(38.35,16.76) 38.86,16.76 ; v1(38.35,16.76) 38.35,17.27 ; v1(38.35,16.76) 37.85,16.76 ; v2(14.61,35.43) 15.06,35.43 ; v2(14.61,35.43) 14.61,34.98 ; v2(14.61,35.43) 14.61,35.89 ; v2(14.61,35.43) 14.15,35.43 ; 19.09,17.75 v1(19.09,18.25) 18.59,18.25 ; 2.37,24.64 J12.6 ; J12.6 3.3,25.57 ; J12.6 3.3,23.71 ; J12.6 4.23,24.64 ; J6.3 28.09,3.72 ; J6.3 29.12,2.69 ; J6.3 28.09,1.66 ; J6.3 27.06,2.69 ; 37.85,15.49 v1(38.35,15.49) ; v1(38.35,15.49) 38.35,14.99 ; v1(38.35,15.49) 38.86,15.49 ; v1(38.35,15.49) 38.35,16 ; 16.9,2.69 J10.3 ; J10.3 18.96,2.69 ; J10.3 17.93,1.66 ; J10.3 17.93,3.72 ; 41.39,27.93 v1(41.39,28.44) ; v1(41.39,28.44) 40.89,28.44 ; v1(41.39,28.44) 41.39,28.94 ; v1(41.39,28.44) 41.89,28.44 ; J12.8 4.23,27.18 ; J12.8 3.3,26.25 ; J12.8 3.3,28.11 ; J12.8 2.37,27.18 ; v2(17.65,11.05) 17.65,11.5 ; v2(17.65,11.05) 17.65,10.6 ; v2(17.65,11.05) 18.11,11.05 ; v2(17.65,11.05) 17.2,11.05 ; v1(34.54,21.34) 34.54,21.84 ; v1(34.54,21.34) 35.05,21.34 ; v1(34.54,21.34) 34.04,21.34 ; v1(34.54,21.34) 34.54,20.83 ; v1(39.88,10.67) 40.38,10.67 ; v1(39.88,10.67) 39.88,10.17 ; v1(39.88,10.67) 39.38,10.67 ; J7.3 25.55,3.72 ; J7.3 24.52,2.69 ; J7.3 26.58,2.69 ; J7.3 25.55,1.66 ; 19.24,48.21 J16.3 ; J16.3 20.27,49.24 ; J16.3 21.3,48.21 ; J16.3 20.27,47.18 ; v1(44.73,17.3) 45.23,17.3 ; v1(44.73,17.3) 44.73,16.79 ; v1(44.73,17.3) 44.73,17.8 ; v1(44.73,17.3) 44.23,17.3 ; 26.42,10.93 v1(26.42,11.43) ; v1(26.42,11.43) 26.92,11.43 ; v1(26.42,11.43) 25.91,11.43 ; v1(26.42,11.43) 26.42,11.93 ; v1(26.35,22.28) 26.85,22.28 ; v1(26.35,22.28) 26.35,22.78 ; v1(26.35,22.28) 26.35,21.78 ; v1(26.35,22.28) 25.84,22.28 ; 41.31,33.68 v1(41.81,33.68) ; v1(41.81,33.68) 41.81,33.18 ; v1(41.81,33.68) 41.81,34.18 ; v2(45.97,17.27) 46.43,17.27 ; v2(45.97,17.27) 45.52,17.27 ; v2(45.97,17.27) 45.97,16.82 ; v2(45.97,17.27) 45.97,17.72 ; v1(29.92,48.72) 30.42,48.72 ; v1(29.92,48.72) 29.92,48.21 ; v1(29.92,48.72) 29.42,48.72 ; v1(29.92,48.72) 29.92,49.22 ; v1(20.57,32.28) 20.57,32.79 ; v1(20.57,32.28) 20.57,31.78 ; v1(20.57,32.28) 21.08,32.28 ; v1(20.57,32.28) 20.07,32.28 ; J12.14 3.3,35.73 ; J12.14 2.37,34.8 ; J12.14 4.23,34.8 ; J12.14 3.3,33.87 ; 11.49,20.17 v3(12.19,20.17) ; v3(12.19,20.17) 12.19,20.87 ; v3(12.19,20.17) 12.19,19.46 ; v3(12.19,20.17) 12.89,20.17 ; v2(28.24,10.5) 28.24,10.95 ; v2(28.24,10.5) 28.69,10.5 ; v2(28.24,10.5) 27.79,10.5 ; v1(18.57,27.97) 18.57,28.47 ; v1(18.57,27.97) 19.07,27.97 ; v1(18.57,27.97) 18.06,27.97 ; v1(18.57,27.97) 18.57,27.46 ; 25.15,34.3 v1(25.15,34.8) ; v1(25.15,34.8) 25.15,35.3 ; v1(25.15,34.8) 24.64,34.8 ; v1(25.15,34.8) 25.65,34.8 ; J12.4 4.23,22.1 ; J12.4 2.37,22.1 ; J12.4 3.3,23.03 ; J12.4 3.3,21.17 ; 48.01,33.79 v1(48.01,34.3) ; v1(48.01,34.3) 48.52,34.3 ; v1(48.01,34.3) 47.51,34.3 ; 31.12,35.44 v4(31.12,36.07) ; v4(31.12,36.07) 30.49,36.07 ; v4(31.12,36.07) 31.12,36.7 ; v1(14.63,29.36) 14.63,29.87 ; v1(14.63,29.36) 14.13,29.36 ; v1(14.63,29.36) 14.63,28.86 ; v1(14.63,29.36) 15.13,29.36 ; J12.12 4.23,32.26 ; J12.12 3.3,31.33 ; J12.12 2.37,32.26 ; J12.12 3.3,33.19 ; v4(1.52,16) 1.52,16.63 ; v4(1.52,16) 2.15,16 ; v4(1.52,16) 1.52,15.37 ; v4(1.52,16) 0.9,16 ; 21.6,27.43 v1(22.1,27.43) ; v1(22.1,27.43) 22.1,26.93 ; v1(22.1,27.43) 22.1,27.93 ; v1(22.1,27.43) 22.6,27.43 ; v1(35.97,30.53) 35.97,31.03 ; v1(35.97,30.53) 35.46,30.53 ; v1(35.97,30.53) 35.97,30.03 ; v1(35.97,30.53) 36.47,30.53 ; 2.37,19.56 J12.2 ; J12.2 3.3,20.49 ; J12.2 4.23,19.56 ; J12.2 3.3,18.63 ; 31.81,12.95 v2(32.26,12.95) ; v2(32.26,12.95) 32.71,12.95 ; v2(32.26,12.95) 32.26,13.41 ; v2(32.54,15.49) 32.54,15.95 ; v2(32.54,15.49) 32.08,15.49 ; v2(32.54,15.49) 32.54,15.04 ; v2(32.54,15.49) 32.99,15.49 ; v4(10.92,16.59) 11.55,16.59 ; v4(10.92,16.59) 10.29,16.59 ; v4(10.92,16.59) 10.92,15.96 ; v4(10.92,16.59) 10.92,17.22 ; 26.37,48.72 v1(26.87,48.72) ; v1(26.87,48.72) 27.38,48.72 ; v1(26.87,48.72) 26.87,48.21 ; v1(26.87,48.72) 26.87,49.22 ; 24.06,36.2 v2(24.51,36.2) ; v2(24.51,36.2) 24.51,36.65 ; v2(24.51,36.2) 24.51,35.74 ; v2(24.51,36.2) 24.96,36.2 ; 33.59,20.07 v1(33.09,20.07) 33.09,20.57 ; J13.3 13.68,48.21 ; J13.3 12.65,49.24 ; J13.3 12.65,47.18 ; J13.3 11.62,48.21 ; v1(26.19,20.47) 26.69,20.47 ; v1(26.19,20.47) 25.68,20.47 ; v1(26.19,20.47) 26.19,20.98 ; 17.73,47.18 J15.3 ; J15.3 18.76,48.21 ; J15.3 17.73,49.24 ; J15.3 16.7,48.21 ; 11.49,33.53 v3(12.19,33.53) ; v3(12.19,33.53) 12.89,33.53 ; v3(12.19,33.53) 12.19,34.23 ; v3(12.19,33.53) 12.19,32.83 ; 15.39,1.66 J11.3 ; J11.3 15.39,3.72 ; J11.3 16.42,2.69 ; J11.3 14.36,2.69 ; 2.37,37.34 J12.16 ; J12.16 4.23,37.34 ; J12.16 3.3,36.41 ; J12.16 3.3,38.27 ; 16,22.61 v1(15.49,22.61) 15.49,23.11 ; J2.4 33.2,46.57 ; J2.4 33.2,44.51 ; J2.4 32.17,45.54 ; J2.4 34.23,45.54 ; 42.95,6.63 v1(42.95,7.14) ; v1(42.95,7.14) 43.45,7.14 ; v1(42.95,7.14) 42.45,7.14 ; v1(42.95,7.14) 42.95,7.64 ; v1(48.77,32.23) 48.77,32.74 ; v1(48.77,32.23) 48.77,31.73 ; v1(48.77,32.23) 49.27,32.23 ; v1(48.77,32.23) 48.27,32.23 ; J8.3 23.01,3.72 ; J8.3 21.98,2.69 ; J8.3 24.04,2.69 ; J8.3 23.01,1.66 ; 34.83,0.67 v1(34.83,1.18) ; v1(34.83,1.18) 34.33,1.18 ; v1(34.83,1.18) 34.83,1.68 ; v1(34.83,1.18) 35.33,1.18 ; 37.34,0.67 v1(37.34,1.18) ; v1(37.34,1.18) 36.84,1.18 ; v1(37.34,1.18) 37.84,1.18 ; J14.3 15.19,49.24 ; J14.3 16.22,48.21 ; J14.3 15.19,47.18 ; J14.3 14.16,48.21 ; v1(26.92,34.8) 27.43,34.8 ; v1(26.92,34.8) 26.92,34.3 ; v1(26.92,34.8) 26.92,35.3 ; v1(26.92,34.8) 26.42,34.8
  BOTTOM w0.152: C40.2 C41.2 C39.2 C38.2 ; 19.44,17.48 U1.71
  BOTTOM w0.203: 19.44,17.48 19.44,17.9 v1(19.09,18.25) ; R3.2 v1(44.48,28.45)
  BOTTOM w0.305: v1(14.63,29.36) 15.06,28.94 U1.93 ; v2(14.61,35.43) 15.11,35.94 U1.107 ; C38.2 17.27,11.43 v2(17.65,11.05) ; v2(24.51,36.2) 24.94,36.62 U1.121 ; U1.134 31.44,36.39 v4(31.12,36.07) ; v2(1.52,12.95) v2(1.52,11.68) ; v2(32.54,15.49) 32.54,15.52 32.94,15.92 U1.44 ; U1.6 41.55,33.94 v1(41.81,33.68) ; U1.17 v1(41.39,28.44) 40.89,27.94 U1.18 ; v1(26.31,15.65) 26.44,15.77 U1.57
  BOTTOM w0.508: C31.2 33.6,12.98 C30.2 v2(32.26,12.95) C28.2
P3V3: length 156.1
  TOP w0.152: v2(30.99,14.48) 30.91,14.4 U5.1 ; v1(46.53,30.73) 46.61,30.73 ; 21.74,24.58 U3.16 ; U6.1 v2(17.23,14.4)
  TOP w0.203: v1(14.73,21.84) R14.1 R13.1 ; v1(13.36,30.89) v1(14.63,30.89) ; C25.1 v1(19.3,25.65) 19.3,25.63 ; TP1.1 v1(48.41,7.52) ; R6.1 v1(46.53,30.73) ; R7.2 v1(43.13,33.78)
  TOP w0.305: U3.15 21.74,24.58 ; v1(28.45,34.8) v1(28.45,33.27) 29.68,32.04 U2.14 ; C2.1 v4(32.64,36.07) ; v1(19.52,23.58) U3.1 20.63,24.44 20.77,24.58 U3.16 21.63,25.57 v1(21.92,25.86) ; C6.1 v2(26.04,36.2) ; C7.1 v2(14.61,36.96) ; U2.1 25.72,29.24 25.2,29.77 25.2,33.22 v1(25.15,33.27)
  TOP w0.508: v2(34.04,15.49) 34.04,16.56 C11.1 ; U4.4 46.19,15.53 v1(45.97,15.75) v1(44.75,15.75)
  POWER w0.508: v1(28.45,33.27) 28.95,33.27 ; v1(28.45,33.27) 28.45,32.77 ; v1(28.45,33.27) 28.45,33.78 ; v1(28.45,33.27) 27.95,33.27 ; v2(26.04,36.2) 26.49,36.2 ; v2(26.04,36.2) 25.58,36.2 ; v2(26.04,36.2) 26.04,35.74 ; v2(26.04,36.2) 26.04,36.65 ; v1(26.42,9.91) 26.92,9.91 ; v1(26.42,9.91) 25.91,9.91 ; v1(26.42,9.91) 26.42,9.4 ; v1(26.42,9.91) 26.42,10.41 ; 14.13,30.89 v1(14.63,30.89) ; v1(14.63,30.89) 14.63,30.38 ; v1(14.63,30.89) 15.13,30.89 ; v1(14.63,30.89) 14.63,31.39 ; 18.06,14.48 v1(18.57,14.48) ; v1(18.57,14.48) 18.57,14.98 ; v1(18.57,14.48) 18.57,13.98 ; v1(18.57,14.48) 19.07,14.48 ; v1(28.45,34.8) 28.45,35.3 ; v1(28.45,34.8) 27.95,34.8 ; v1(28.45,34.8) 28.45,34.3 ; v1(28.45,34.8) 28.95,34.8 ; v1(13.36,30.89) 13.86,30.89 ; v1(13.36,30.89) 13.36,30.38 ; v1(13.36,30.89) 12.86,30.89 ; v1(13.36,30.89) 13.36,31.39 ; v1(44.75,15.75) 45.26,15.75 ; v1(44.75,15.75) 44.25,15.75 ; v1(44.75,15.75) 44.75,16.25 ; v1(44.75,15.75) 44.75,15.25 ; v1(48.41,7.52) 48.92,7.52 ; v1(48.41,7.52) 48.41,8.02 ; v1(48.41,7.52) 47.91,7.52 ; v1(48.41,7.52) 48.41,7.02 ; 42.45,9.42 v1(42.95,9.42) ; v1(42.95,9.42) 42.95,8.92 ; v1(42.95,9.42) 43.45,9.42 ; v1(42.95,9.42) 42.95,9.93 ; v1(14.73,18.8) 14.73,19.3 ; v1(14.73,18.8) 14.73,18.29 ; v1(14.73,18.8) 14.23,18.8 ; v1(14.73,18.8) 15.23,18.8 ; v4(0.58,14.48) 1.21,14.48 ; v4(0.58,14.48) 0.58,15.11 ; v4(0.58,14.48) 0.58,13.85 ; 14.15,36.96 v2(14.61,36.96) ; v2(14.61,36.96) 14.61,37.41 ; v2(14.61,36.96) 14.61,36.5 ; v2(14.61,36.96) 15.06,36.96 ; 34.54,22.36 v1(34.54,22.86) ; v1(34.54,22.86) 34.54,23.36 ; v1(34.54,22.86) 34.04,22.86 ; v1(34.54,22.86) 35.05,22.86 ; 30.99,14.03 v2(30.99,14.48) ; v2(30.99,14.48) 31.44,14.48 ; v2(30.99,14.48) 30.99,14.93 ; v2(30.99,14.48) 30.54,14.48 ; v1(25.15,33.27) 25.15,33.78 ; v1(25.15,33.27) 24.64,33.27 ; v1(25.15,33.27) 25.15,32.77 ; v1(25.15,33.27) 25.65,33.27 ; 13.97,46.48 14.48,45.97 ; v1(40.28,29.87) 40.28,30.37 ; v1(40.28,29.87) 40.28,29.37 ; v1(40.28,29.87) 40.79,29.87 ; v1(40.28,29.87) 39.78,29.87 ; 17.73,44.64 J15.2 ; J15.2 18.76,45.67 ; J15.2 16.7,45.67 ; v1(19.3,25.65) 19.3,26.16 ; v1(19.3,25.65) 19.3,25.15 ; v1(19.3,25.65) 19.81,25.65 ; v1(19.3,25.65) 18.8,25.65 ; 43.13,33.28 v1(43.13,33.78) ; v1(43.13,33.78) 43.63,33.78 ; v1(43.13,33.78) 43.13,34.28 ; 41.81,34.7 v1(41.81,35.2) ; v1(41.81,35.2) 42.31,35.2 ; v1(41.81,35.2) 41.31,35.2 ; v1(41.81,35.2) 41.81,35.71 ; v1(46.25,11.96) 46.25,12.47 ; v1(46.25,11.96) 45.75,11.96 ; v1(46.25,11.96) 46.76,11.96 ; v1(46.25,11.96) 46.25,11.46 ; 21.92,25.35 v1(21.92,25.86) ; v1(21.92,25.86) 21.92,26.36 ; v1(21.92,25.86) 21.42,25.86 ; 27.34,15.65 v1(27.84,15.65) ; v1(27.84,15.65) 27.84,16.15 ; v1(27.84,15.65) 28.34,15.65 ; v1(27.84,15.65) 27.84,15.14 ; 14.16,45.67 J14.2 ; J14.2 15.19,44.64 ; J14.2 16.22,45.67 ; v2(34.04,15.49) 34.04,15.95 ; v2(34.04,15.49) 34.49,15.49 ; v2(34.04,15.49) 33.58,15.49 ; 48.08,22.89 J1.1 48.74,23.55 ; v4(32.64,36.07) 33.27,36.07 ; v4(32.64,36.07) 32.64,36.7 ; v4(32.64,36.07) 32.64,35.44 ; J13.2 13.68,45.67 ; J13.2 12.65,44.64 ; J13.2 12.65,46.7 ; J13.2 11.62,45.67 ; 39.38,11.94 v1(39.88,11.94) ; v1(39.88,11.94) 39.88,12.44 ; v1(39.88,11.94) 40.38,11.94 ; v1(19.52,23.58) 19.52,24.08 ; v1(19.52,23.58) 19.52,23.08 ; v1(19.52,23.58) 19.02,23.58 ; v1(19.52,23.58) 20.03,23.58 ; 5.82,11.67 v3(5.82,12.37) ; v3(5.82,12.37) 5.82,13.07 ; v3(5.82,12.37) 5.11,12.37 ; v3(5.82,12.37) 6.52,12.37 ; 14.73,21.34 v1(14.73,21.84) 14.23,21.84 ; v1(34.42,30.56) 34.92,30.56 ; v1(34.42,30.56) 34.42,31.06 ; v1(34.42,30.56) 34.42,30.05 ; v1(34.42,30.56) 33.91,30.56 ; J16.2 21.3,45.67 ; J16.2 20.27,44.64 ; J16.2 19.24,45.67 ; v1(43.79,25.04) 44.29,25.04 ; v1(43.79,25.04) 43.79,25.55 ; v1(43.79,25.04) 43.29,25.04 ; v1(43.79,25.04) 43.79,24.54 ; 17.23,13.94 v2(17.23,14.4) ; v2(17.23,14.4) 17.23,14.85 ; v2(17.23,14.4) 17.68,14.4 ; v2(17.23,14.4) 16.77,14.4 ; v1(45.97,15.75) 45.97,16.25 ; v1(45.97,15.75) 45.97,15.25 ; v1(45.97,15.75) 46.48,15.75 ; v1(45.97,15.75) 45.47,15.75 ; 39.62,40 40.13,39.5 ; 46.03,30.73 v1(46.53,30.73) ; v1(46.53,30.73) 46.53,30.23 ; v1(46.53,30.73) 46.53,31.24
  BOTTOM w0.152: v2(30.99,14.48) C29.1
  BOTTOM w0.203: v1(43.79,25.04) 43.74,25.04 43.62,24.92 L1.2
  BOTTOM w0.305: C36.1 v1(44.75,15.75) v1(45.97,15.75) ; U1.108 15.13,36.44 v2(14.61,36.96) ; v1(40.28,29.87) 40.28,29.11 40.11,28.94 U1.16 ; C38.1 C39.1 18.54,14.61 19.94,16 U1.70 ; 5.82,12.37 4.86,12.37 4.18,11.68 C18.1 C17.1 ; 5.82,12.37 Y1.4 7.29,12.37 ; 5.82,12.37 v3(5.82,12.37) ; U1.5 41.04,34.44 v1(41.81,35.2) ; v1(27.84,15.65) 27.33,15.65 26.94,16.04 U1.56 ; v2(26.04,36.2) 25.44,36.79 U1.122 ; v1(19.3,25.65) 19.3,23.8 v1(19.52,23.58) ; U1.94 15.95,29.44 14.63,30.76 v1(14.63,30.89) ; v2(34.04,15.49) 33.44,16.09 U1.43 ; U1.135 31.94,36.77 v4(32.64,36.07) ; R10.2 v4(0.58,14.48)
  BOTTOM w0.508: C39.1 v1(18.57,14.48)
P5V: length 117.8
  TOP w0.305: C32.1 40.6,14.22 40.61,14.23 U4.19 ; v2(21.97,14.99) 22.1,14.86 22.1,14.62 U6.14 21.13,14.4 20.57,13.84 20.57,13.08 17.27,9.78 14.86,9.78 13.28,8.2 13.28,6.17 14.22,5.23 J11.2 ; U4.15 40.67,16.83 40.6,16.76 C34.1
  TOP w0.508: v1(33.61,14.4) U5.14 36.84,14.4 37.49,13.74 37.49,12.57 ; v3(42.04,11.94) 39.88,14.1 C32.1 ; 37.21,12.29 37.49,12.57 ; 37.49,12.57 37.92,13 38.68,13
  TOP w0.635: 37.21,9.14 36.35,8.28 36.35,6.42 C42.1 35.14,5.43 34.95,5.23 J4.2 J5.2 J6.2 J7.2 J8.2 J9.2 J10.2 J11.2 ; 37.21,9.14 37.21,12.29 ; 37.21,9.14 R26.1 ; 38.68,13 39.08,13.4 39.5,13.4 39.69,13.58 39.69,14.03 C32.1 C33.1 C34.1
  POWER w0.508: J2.1 43.23,43.13 45.29,43.13 49.53,38.89 49.53,11.94 48.16,10.57 43.41,10.57 v3(42.04,11.94)
  BOTTOM w0.152: C41.1 C40.1
  BOTTOM w0.305: C40.1 21.86,14.48 22.06,14.68 22.06,14.9 v2(21.97,14.99)
  BOTTOM w0.508: C31.1 33.72,14.5 v1(33.61,14.4)
VDDA: length 7.3
  BOTTOM w0.152: 40.39,21.44 41.66,21.44 ; 40.39,21.44 U1.31 ; 40.39,21.44 v2(40.39,21.97) ; 41.66,21.44 42.42,22.19 L2.2 42.42,23.44 L1.1 ; 41.66,21.44 v2(41.66,22.35)
VSSA: length 8.2
  TOP w0.152: C13.2 40.77,20.83 C5.2 40.13,20.19 v2(40.13,19.94) ; L3.2 35.12,20.07 L4.1
  BOTTOM w0.152: v2(35.81,19.3) 36.45,19.94 U1.34 v2(40.13,19.94)
50MHZ_OSC: length 5.9
  BOTTOM w0.305: R9.2 14.73,14.61 15.88,15.75 18.64,15.75 18.94,16.04 U1.72
ADC0_SE16: length 1.5
  BOTTOM w0.152: R2.2 R3.1
ADIN_0: length 4.1
  BOTTOM w0.305: J12.1 7.87,21.59 R33.1
ADIN_1: length 3.7
  BOTTOM w0.305: R34.1 6.86,23.11 J12.3
ADIN_2: length 3.3
  BOTTOM w0.305: R35.1 J12.5
ADIN_3: length 3.7
  BOTTOM w0.305: R36.1 6.86,26.16 J12.7
ADIN_4: length 4.1
  BOTTOM w0.305: J12.9 7.87,27.69 R37.1
ADIN_5: length 5
  BOTTOM w0.305: J12.11 7.11,30.99 7.11,30.23 8.13,29.21 R38.1
ADIN_6: length 6
  BOTTOM w0.305: R39.1 8.13,30.73 7.62,31.24 7.62,33.02 J12.13
ADIN_7: length 6.4
  BOTTOM w0.305: J12.15 9.14,34.04 R40.1
ECHO: length 1.9
  BOTTOM w0.203: J2.3 R46.2
FXOS8700CQ_CRST: length 5.1
  TOP w0.152: U2.8 29.68,24.55 28.45,23.32 C27.1
FXOS8700CQ_I2C_SA0: length 12.9
  TOP w0.152: R17.2 R19.1 32.37,21.34 32.12,21.08 28.63,21.08 27.69,22.02 27.69,23.27 29.18,24.77 U2.7
FXOS8700CQ_I2C_SA1: length 6.9
  TOP w0.152: R21.1 35.94,29.03 R20.2 34.42,28.07 33.81,27.46 33.07,27.46 32.78,27.74 U2.10
L3G4200D_I2C_SA0: length 6.4
  TOP w0.152: U3.4 18.46,21.63 17.14,20.32 R18.1 R16.2
MMA8451_BYP: length 6.8
  TOP w0.203: C26.1 22.86,31.24 25.36,28.74 26.97,28.74 U2.2
OSC_OE: length 4.6
  BOTTOM w0.305: Y1.1 3.63,16.59 3.51,16.59 3.05,16.13 R11.1 R10.1
PTA0: length 25.9
  TOP w0.152: v2(36.07,24.38) 38.79,24.38 39.9,23.27 42.52,23.27 43.79,22 v2(45.77,22)
  BOTTOM w0.152: v2(36.07,24.38) 35.56,23.88 32.51,23.88 32.13,23.5 32.13,21.84 29.94,19.65 U1.50
  BOTTOM w0.203: J1.4 46.43,24.82 45.95,24.33 45.95,22.17 v2(45.77,22)
PTA1: length 28.3
  TOP w0.152: v2(45.11,22.73) 45.08,22.71 43.51,22.71 42.57,23.65 40.03,23.65 38.54,25.14 v2(36.07,25.14)
  BOTTOM w0.152: v2(36.07,25.14) 35.93,25.14 35.05,24.26 32.19,24.26 31.63,23.7 31.63,21.98 29.44,19.78 U1.51
  BOTTOM w0.203: v2(45.11,22.73) 45.11,22.91 44.88,23.14 44.88,25.6 46.63,27.36 J1.8
PTA2: length 26.9
  TOP w0.152: v2(36.07,25.89) 38.3,25.89 40.16,24.03 42.62,24.03 43.08,23.57 45.26,23.57 v2(45.42,23.72)
  BOTTOM w0.152: v2(36.07,25.89) 35.92,25.89 34.67,24.64 31.86,24.64 31.13,23.91 31.13,21.99 28.94,19.79 U1.52
  BOTTOM w0.203: J1.6 45.42,24.69 v2(45.42,23.72)
PTA3: length 26.6
  TOP w0.152: v2(36.07,26.64) 38.18,26.64 40.41,24.41 45.95,24.41 J1.2
  BOTTOM w0.152: v2(36.07,26.64) 35.91,26.64 34.29,25.02 31.53,25.02 30.63,24.12 30.63,22 28.44,19.8 U1.53
PTA6: length 9
  TOP w0.152: v2(27.46,19.84) 25.09,19.84 24.76,19.51 23.43,19.51 22.93,20 U3.7
  BOTTOM w0.152: U1.58 25.94,17.93 27.43,19.42 27.43,19.81 v2(27.46,19.84)
PTA7: length 8.3
  TOP w0.152: U3.6 22.28,19.71 22.79,19.2 26.06,19.2 26.19,19.33 v2(26.44,19.33)
  BOTTOM w0.152: U1.59 25.44,18.58 26.19,19.33 v2(26.44,19.33)
PTA14: length 5.7
  BOTTOM w0.152: U1.66 21.94,15.83 23.03,14.74 23.03,14.08 24.21,12.9 R44.1
PTB0: length 13
  TOP w0.152: v2(19.18,19.05) 18.83,19.05 18.16,18.39 18.16,14.85 17.83,14.52 17.83,14.15 17.43,13.75 U6.2
  BOTTOM w0.152: U1.81 18.34,22.94 19.18,22.1 v2(19.18,19.05)
PTB1: length 15.1
  TOP w0.152: v2(19.94,18.92) 19.94,14.94 18.1,13.1 U6.3
  BOTTOM w0.152: v2(19.94,18.92) 19.94,21.97 18.47,23.44 U1.82
PTB2: length 7.4
  BOTTOM w0.305: U1.83 12.89,23.94 10.67,21.72 v2(10.67,21.59)
PTB3: length 6.9
  BOTTOM w0.305: U1.84 11.99,24.44 v2(10.67,23.11)
PTB4: length 6.5
  BOTTOM w0.305: U1.85 16.95,24.98 11.01,24.98 v2(10.67,24.64)
PTB5: length 6.6
  BOTTOM w0.305: v2(10.67,26.16) 12.12,26.16 12.84,25.44 U1.86
PTB6: length 7
  BOTTOM w0.305: U1.87 13.36,25.94 11.61,27.69 v2(10.67,27.69)
PTB7: length 7.5
  BOTTOM w0.305: U1.88 13.87,26.44 11.1,29.21 v2(10.67,29.21)
PTB10: length 7.5
  BOTTOM w0.305: v2(10.67,30.73) 13.47,27.94 U1.91
PTB11: length 8.1
  BOTTOM w0.305: v2(10.67,32.26) 10.67,31.93 14.16,28.44 U1.92
PTB18: length 23.8
  TOP w0.152: U6.4 17.97,12.45 20.7,15.18 v2(20.7,18.92)
  BOTTOM w0.152: v2(20.7,18.92) 20.4,19.23 20.4,29.13 18.59,30.94 U1.97
PTB19: length 25.9
  TOP w0.152: U6.5 17.89,11.8 21.46,15.37 v2(21.46,18.92)
  BOTTOM w0.152: v2(21.46,18.92) 20.9,19.48 20.9,29.64 19.11,31.44 U1.98
PTC1: length 32.5
  TOP w0.152: v2(23.11,15.54) 22.48,16.18 v2(22.48,18.29) ; v2(26.95,14.76) 27.1,14.61 27.1,14.56 27.91,13.75 U5.2
  BOTTOM w0.152: v2(22.48,18.29) 24.28,20.09 24.28,30.45 20.3,34.44 U1.104 ; v2(23.11,15.54) 23.77,14.88 26.82,14.88 v2(26.95,14.76)
PTC2: length 33.7
  TOP w0.152: v2(23.24,18.29) 23.65,17.88 v2(23.65,14.25) ; U5.3 27.09,13.1 26.29,13.89 26.29,14.15 v2(26.19,14.25)
  BOTTOM w0.152: v2(23.24,18.29) 24.77,19.81 24.77,30.68 20.51,34.94 U1.105 ; v2(26.19,14.25) v2(23.65,14.25)
PTC3: length 34.1
  TOP w0.152: v2(24.28,13.74) 24.41,13.87 24.41,17.88 v2(24,18.29) ; v2(25.68,13.61) 25.93,13.61 27.1,12.45 U5.4
  BOTTOM w0.152: v2(24.28,13.74) 24.41,13.61 v2(25.68,13.61) ; U1.106 20.72,35.44 25.15,31.01 25.15,19.43 v2(24,18.29)
PTC4: length 34.2
  TOP w0.152: v2(24.77,18.29) 24.94,18.11 24.94,13.56 26.03,12.47 26.57,12.47 27.24,11.8 U5.5
  BOTTOM w0.152: U1.109 18.94,37.2 20.07,36.07 20.96,36.07 25.53,31.5 25.53,19.18 24.77,18.42 v2(24.77,18.29)
PTD0: length 18.4
  BOTTOM w0.203: U1.127 27.94,40.14 27.48,40.59 14.99,40.59 12.65,42.93 J13.1
PTD1: length 16.4
  BOTTOM w0.203: U1.128 28.44,40.25 27.64,41.05 17.12,41.05 15.19,42.98 J14.1
PTD2: length 14.6
  BOTTOM w0.203: J15.1 17.73,42.88 19.1,41.5 27.94,41.5 28.94,40.51 U1.129
PTD3: length 12.6
  BOTTOM w0.203: U1.130 29.44,40.77 28.24,41.96 21.23,41.96 20.27,42.93 J16.1
PTD5: length 9.1
  BOTTOM w0.203: R22.1 25.35,43.54 26.47,42.42 28.55,42.42 30.44,40.53 U1.132
PTD6: length 8.2
  BOTTOM w0.203: R23.1 26.87,43.51 27.51,42.88 28.85,42.88 30.94,40.79 U1.133
PTD7: length 7.4
  BOTTOM w0.203: U1.136 32.44,40.11 R24.1
PTD8: length 7
  BOTTOM w0.203: R25.1 29.92,43.33 32.94,40.32 U1.137
PTD14: length 3.8
  BOTTOM w0.203: U1.143 35.94,41.92 R46.1
PTD15: length 4.5
  BOTTOM w0.203: R45.1 36.44,40.27 U1.144
PTE11: length 8.6
  TOP w0.152: U2.11 v1(33.4,28.24)
  BOTTOM w0.152: U1.14 36.36,29.94 34.67,28.24 v1(33.4,28.24)
PTE12: length 9.2
  TOP w0.152: U2.9 32.67,27.24 33.12,26.8 33.4,26.8 v1(33.43,26.77)
  BOTTOM w0.152: v1(33.43,26.77) 34.34,26.77 37.01,29.44 U1.15
PTE24: length 33
  TOP w0.152: 22.43,26.49 22.94,26.49 23.52,25.91 24.89,25.91 27.05,23.75 27.05,21.72 28.57,20.19 31.5,20.19 v2(32.64,19.05) ; 22.43,26.49 21.54,26.49 18.59,23.55 ; 22.43,26.49 23.27,27.33 ; 18.59,23.55 19.21,22.93 U3.2 ; 18.59,23.55 16.99,25.15 R13.2
  TOP w0.203: U2.4 23.68,27.74 23.27,27.33
  BOTTOM w0.152: U1.45 32.44,18.37 32.64,18.57 v2(32.64,19.05)
PTE25: length 32.2
  TOP w0.152: v2(31.5,19.18) 30.86,19.81 28.45,19.81 27.15,21.11 24.16,21.11 23.95,21.31 21.5,21.31 21.29,21.53 21.29,22.02 21.03,22.28 U3.3 18.61,22.28 17.27,23.62 R14.2 ; U2.6 28.68,24.9 27.38,23.6 27.38,21.89 28.7,20.57 v2(32,20.57)
  BOTTOM w0.152: U1.46 31.94,19.17 ; 31.94,19.17 32,19.24 v2(32,20.57) ; 31.94,19.17 31.5,19.17 v2(31.5,19.18)
PTE28: length 16.4
  BOTTOM w0.152: U1.49 30.44,15.7 30.05,15.32 29.51,15.32 28.8,14.61 28.8,10.49 29.29,10.01 34.34,10.01 34.85,9.5 34.85,8.64 35.36,8.13 R43.1
PWM_MOTOR1: length 8.3
  TOP w0.152: J4.1 33.17,8.83 32.64,9.36 32.64,12.22 34.17,13.75 U5.13
PWM_MOTOR2: length 8.8
  TOP w0.152: v2(32,11.99) 32,9.27 30.63,7.9 J5.1 ; v2(33.22,11.99) 34.33,13.1 U5.12
  BOTTOM w0.152: v2(33.22,11.99) v2(32,11.99)
PWM_MOTOR3: length 9.7
  TOP w0.152: v2(33.17,11.2) 34.42,12.45 U5.11 ; v2(31.39,11.2) 31.39,10.69 28.47,7.77 J6.1
  BOTTOM w0.152: v2(31.39,11.2) v2(33.17,11.2)
PWM_MOTOR4: length 12.7
  TOP w0.152: J7.1 25.55,7.85 27.15,9.45 v2(27.74,9.45) ; v2(33.81,9.45) 33.81,11.04 34.56,11.8 U5.10
  BOTTOM w0.152: v2(27.74,9.45) v2(33.81,9.45)
PWM_MOTOR5: length 7.8
  TOP w0.152: J8.1 23.01,7.9 23.9,8.79 23.9,12.73 22.88,13.75 U6.13
PWM_MOTOR6: length 8.4
  TOP w0.152: U6.12 22.77,13.1 23.52,12.34 23.52,9.93 22.71,9.12 21.74,9.12 20.47,7.85 J9.1
PWM_MOTOR7: length 9.6
  TOP w0.152: U6.11 22.78,12.45 23.16,12.06 23.16,10.08 22.71,9.63 19.74,9.63 17.93,7.82 J10.1
PWM_MOTOR8: length 8.2
  TOP w0.152: J11.1 15.39,7.9 16.64,9.14 18.03,9.14 20.69,11.8 U6.10
RESET_B: length 48.5
  TOP w0.152: v2(47.74,30.99) 47.24,31.48 C16.2 D1.C R7.1 45.72,33.91 45.26,34.37 45.24,34.37 44.96,34.65 R8.2 ; v2(43.54,20.19) 43.41,20.07 41.27,20.07 39.62,18.41 28.58,18.41 28.17,18.82 22.58,18.82 21.85,19.55 18.41,19.55 v2(18.29,19.43)
  BOTTOM w0.203: v2(43.54,20.19) 43.54,21.08 44.45,22 44.45,26.29 45.86,27.7 ; 46.91,28.73 47.74,29.55 v2(47.74,30.99) ; 46.91,28.73 J1.10 45.88,27.7 45.86,27.7 ; 46.91,28.73 46.89,28.73 45.86,27.7
  BOTTOM w0.305: v2(18.29,19.43) 18.06,19.43 18.06,19.44 U1.74
TRIG: length 1.9
  BOTTOM w0.203: J2.2 R45.2
TXB0104_OE_1: length 5.2
  TOP w0.152: U5.8 35.59,9.78 35.72,9.65 v2(36.2,9.65) ; R29.2 v2(38.35,10.67)
  BOTTOM w0.152: v2(38.35,10.67) 37.21,10.67 v2(36.2,9.65)
TXB0104_OE_2: length 8.2
  TOP w0.152: U6.8 v2(20.2,10.5) ; R32.1 R31.2
  BOTTOM w0.152: v2(20.2,10.5) 24.33,10.5 v2(24.92,9.91)
  vias: v1(24.84,11.38)
VREF_OUT: length 2.3
  TOP w0.508: v2(36.47,15.39) C14.1
  BOTTOM w0.305: v2(36.47,15.39) 36.47,15.65 36.44,15.68 U1.37
VREFH: length 8.2
  TOP w0.152: C12.1 C4.1 37.34,21.59 v2(36.83,21.08)
  BOTTOM w0.152: v2(36.83,21.08) 36.98,20.94 U1.32 41.77,20.94 41.81,20.9 L2.1
VREFL: length 5.3
  TOP w0.152: L3.1 C4.2 C12.2
  BOTTOM w0.152: v2(35.81,20.7) 36.08,20.44 U1.33
VREGIN: length 5.7
  TOP w0.203: v1(42.93,28.45) 42.52,28.04 42.52,27.9 40.56,25.94 v1(40.16,25.94)
  BOTTOM w0.305: U1.22 v1(40.16,25.94)
XTAL_K64_MAIN: length 4.4
  BOTTOM w0.305: R1.1 14.73,17.6 16.07,18.94 U1.73
N17061674: length 3.9
  BOTTOM w0.305: Y1.3 10.92,13.59 11.81,14.48 R9.1
N17069954: length 6.4
  TOP w0.152: R15.2 16.26,18.92 17.27,19.93 21.18,19.93 21.63,20.38 U3.5
N17070057: length 7.5
  TOP w0.152: v2(22.99,29.84) 22.23,29.84 C22.1 ; v2(22.89,25.55) 22.93,25.51 U3.14
  TOP w0.203: C22.1 C23.1
  BOTTOM w0.152: v2(22.99,29.84) 22.89,29.74 v2(22.89,25.55)
N17070061: length 1.3
  TOP w0.203: R12.2 C23.2
N17085879: length 3.6
  TOP w0.152: SW1.2 46.35,38.35 45.08,37.08 R8.1
N17103835: length 3.1
  TOP w0.152: U4.3 47.07,14.89 v2(45.36,13.18)
N17105972: length 1.7
  TOP w0.152: R28.1 47.75,12.71 47.78,12.74 U4.1
N17115759: length 1.5
  TOP w0.152: D1.A R6.2
N17115953: length 1.5
  TOP w0.152: R26.2 D6.A
N17116464: length 2.3
  TOP w0.203: R27.2 D7.A
N17116870: length 1.5
  BOTTOM w0.203: R22.2 v1(25.35,47.14)
N17116951: length 1.5
  BOTTOM w0.203: R23.2 v1(26.87,47.14)
N17117026: length 1.5
  BOTTOM w0.203: R24.2 v1(28.4,47.14)
N17117112: length 1.5
  BOTTOM w0.203: R25.2 v1(29.92,47.14)
N17132154: length 3.2
  BOTTOM w0.203: U1.19 41.07,27.44 R41.1
N17132157: length 3.5
  BOTTOM w0.203: R42.1 40.3,26.94 U1.20

## Copper pours and planes (outline as drawn; the poured copper is in the pictures)
GND on GND: 2.54,0 0.74,0.74 0,2.54 0,47.45 0.74,49.24 2.54,49.99 47.45,49.99 49.24,49.24 49.99,47.45 49.99,2.54 49.24,0.74 47.45,0 ; 11 cut-outs
P3V3 on BOTTOM (solid shape): 7.41,12.46 7.44,12.37 7.41,12.27 6.54,11.4 5.8,12.37 6.54,13.33
P3V3 on POWER: 2.54,0 0.74,0.74 0,2.54 0,47.45 0.74,49.24 2.54,49.99 47.45,49.99 49.24,49.24 49.99,47.45 49.99,2.54 49.24,0.74 47.45,0 ; 25 cut-outs
OSC_OE on BOTTOM (solid shape): 5.88,16.59 5.14,15.57 4.16,16.49 4.13,16.59 4.16,16.69 5.14,17.6
PTD0 on BOTTOM (solid shape): 13.6,42.08 13.57,42 13.49,41.98 11.8,42.28 12.63,43.15 13.5,43.98
PTD1 on BOTTOM (solid shape): 16.14,42.13 16.11,42.05 16.03,42.03 14.34,42.28 15.17,43.15 16.04,43.98
PTD2 on BOTTOM (solid shape): 18.68,42.03 18.65,41.95 18.56,41.92 16.88,42.28 17.71,43.15 18.58,43.98
